# Allegro board solutionstida01606_powercard_6mar.brd
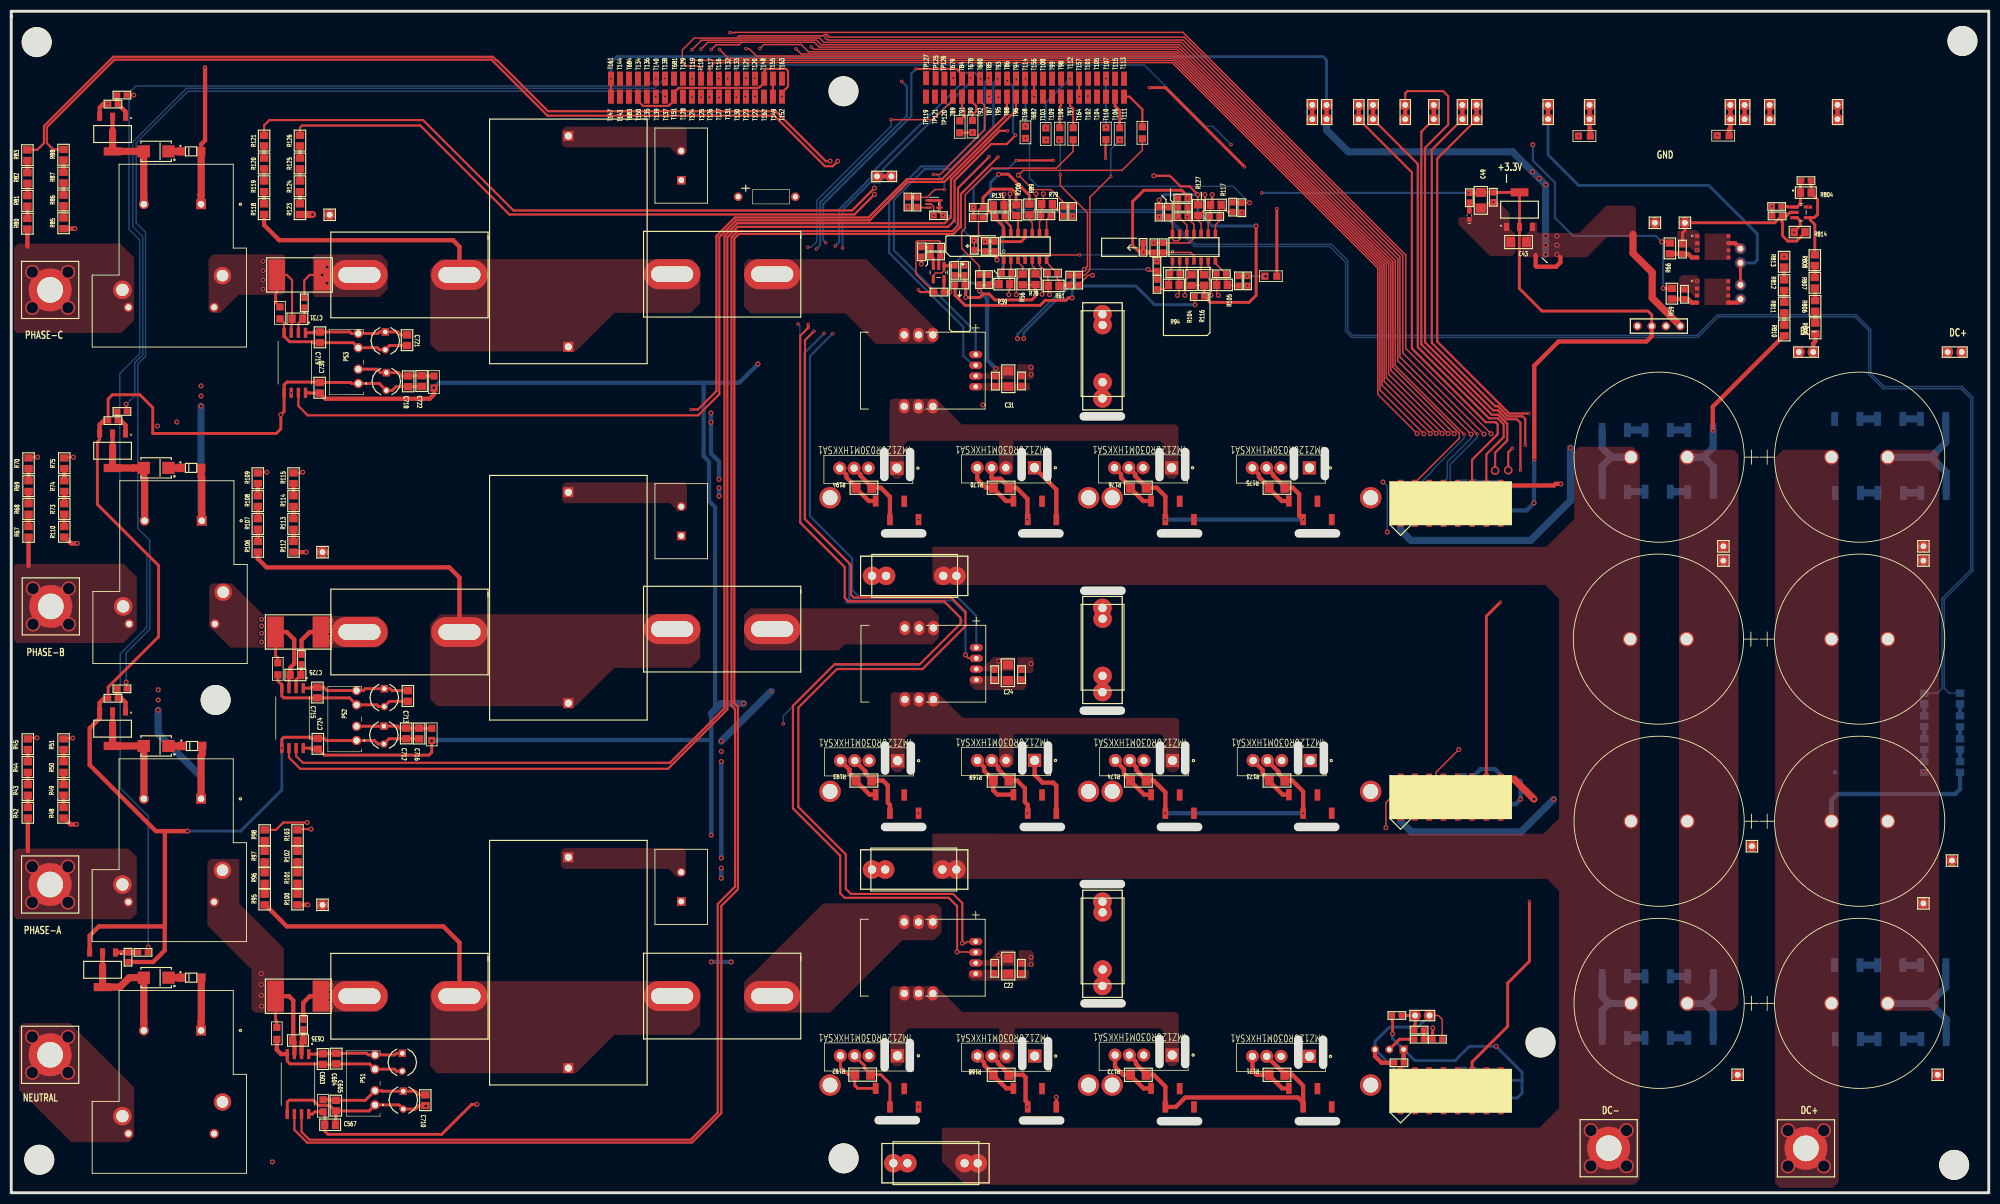
[diagram p0: board, top side]
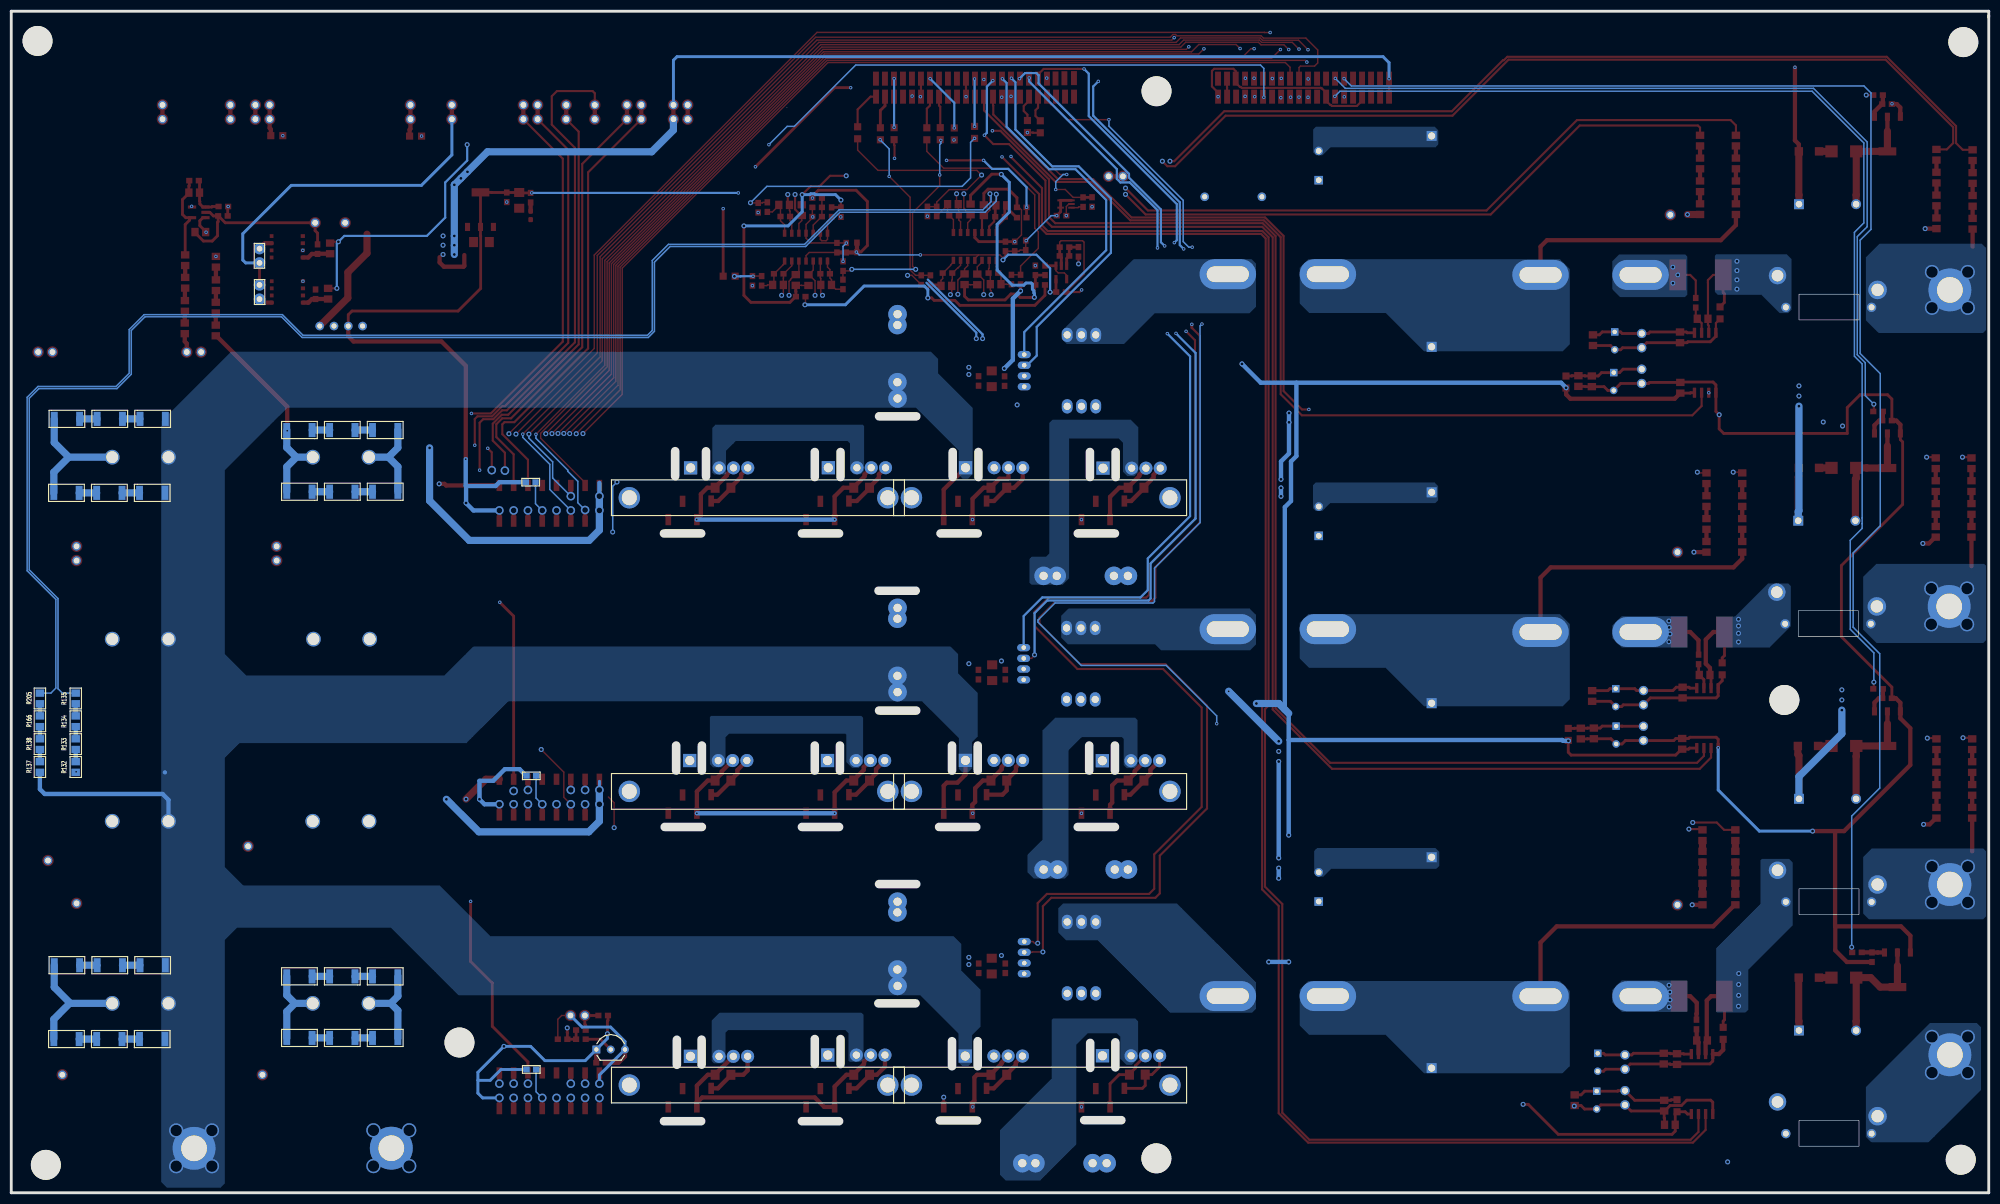
[diagram p1: board, bottom side, seen from below]

Outline 351.43 x 210.11 mm; copper layers: TOP, GND LAYER, PWR LAYER, BOTTOM. Coordinates in mm from the lower left corner of the outline.
Outline path: 0,209.07 0,210.11 351.43,210.11 351.43,0 0,0 0,209.35 ; 154.15,12.9 160.75,12.9 ; 155.17,131.72 155.17,127.28 ; 155.22,26.75 155.22,22.3 ; 155.29,117.25 161.9,117.25 ; 155.29,79.53 155.29,75.08 ; 155.29,65.05 161.9,65.05 ; 159.69,26.64 159.69,22.2 ; 159.74,131.72 159.74,127.28 ; 159.87,79.53 159.87,75.08 ; 179.55,131.72 179.55,127.28 ; 179.68,117.25 186.28,117.25 ; 179.68,79.53 179.68,75.08 ; 179.68,26.95 179.68,22.5 ; 179.8,12.85 186.41,12.85 ; 179.93,65.05 186.54,65.05 ; 184.12,131.72 184.12,127.28 ; 184.25,79.53 184.25,75.08 ; 184.25,26.95 184.25,22.5 ; 190.6,138.07 197.2,138.07 ; 190.6,85.75 197.2,85.75 ; 190.6,54.89 197.2,54.89 ; 190.7,107.06 197.3,107.06 ; 190.73,33.68 197.33,33.68 ; 204.06,131.72 204.06,127.28 ; 204.06,27.33 204.06,22.88 ; 204.16,79.53 204.16,75.08 ; 204.32,117.25 210.92,117.25 ; 204.32,65.05 210.92,65.05 ; 204.32,12.72 210.92,12.72 ; 208.63,131.72 208.63,127.28 ; 208.63,79.53 208.63,75.08 ; 208.63,27.33 208.63,22.88 ; 213.54,193.04 213.64,192.94 ; 227.96,131.85 227.96,127.41 ; 228.7,79.53 228.7,75.08 ; 228.7,65.05 235.3,65.05 ; 228.75,27.23 228.75,22.78 ; 228.83,117.25 235.43,117.25 ; 228.83,12.72 235.43,12.72 ; 233.14,27.2 233.14,22.76 ; 233.27,79.53 233.27,75.08 ; 233.45,131.88 233.45,127.43

## Design rules (mm)
constraint set DEFAULT: min track width 0.127

## Placement (name value [footprint] x y rotation side)
C1  0.15uF 630V TH  [BOXCAPACITOR15MM]  193.93 141.25 180 top
C2  0.15uF 630V TH  [BOXCAPACITOR15MM]  193.93 89.03 180 top
C3  0.15uF 630V TH  [BOXCAPACITOR15MM]  193.93 36.78 180 top
C4  Ele 120uF 600V TH  [CAP_B45_NCH]  323.49 130.81 0 top
C5  Ele 120uF 600V TH  [CAP_B45_NCH]  323.49 33.68 0 top
C6  Ele 120uF 600V TH  [CAP_B45_NCH]  297.86 33.68 180 top
C7  Ele 120uF 600V TH  [CAP_B45_NCH]  297.86 130.81 180 top
C8  10uF TH  [BOXCAP_37_5MM]  99.01 32.16 90 top
C9  10uF TH  [BOXCAP_37_5MM]  99.01 97.06 90 top
C10  10uF TH  [BOXCAP_37_5MM]  99.01 160.43 90 top
C11  0.15uF 630V TH  [BOXCAPACITOR15MM]  156.77 5.26 90 top
C12  0.15uF 630V TH  [BOXCAPACITOR15MM]  152.98 57.48 90 top
C13  0.15uF 630V TH  [BOXCAPACITOR15MM]  152.98 109.7 90 top
C22  10uF 1206 25V  [SNPD1206_MODIFIED]  177.19 40.31 90 top
C23  0.1uF 0603 25V  [RES0603]  174.78 39.92 90 top
C24  10uF 1206 25V  [SNPD1206_MODIFIED]  177.11 92.48 90 top
C25  0.1uF 0603 25V  [RES0603]  174.78 92.14 90 top
C31  10uF 1206 25V  [SNPD1206_MODIFIED]  177.19 144.75 90 top
C32  0.1uF 0603 25V  [RES0603]  174.9 144.34 90 top
C39  0.1uF 0603 25V  [RES0603]  253.45 27.3 180 top
C43  10u 1206 25V  [SNPD1206_MODIFIED]  267.87 169.06 180 top
C44  0.1u 0603 25V  [RES0603]  263.37 177.03 90 top
C47  0.1uF 0603 25V  [RES0603]  173.1 168.29 270 top
C49  10u 1206 25V  [SNPD1206_MODIFIED]  261.16 176.48 270 top
C51  0.1uF 0603 25V  [RES0603]  172.06 162.39 90 top
C52  0.1uF 0603 25V  [RES0603]  159.36 176.19 90 top
C53  0.1uF 0603 25V  [RES0603]  164.78 173.76 0 top
C54  0.1uF 0603 25V  [RES0603]  189.71 162.29 90 top
C55  0.1uF 0603 25V  [RES0603]  188.62 174.51 90 top
C56  1uF 0603 25V  [RES0603]  174.75 168.29 270 top
C57  0.1uF 0603 25V  [RES0603]  203.05 168.06 270 top
C58  1uF 0603 25V  [RES0603]  204.7 168.06 270 top
C59  0.1uF 0603 25V  [RES0603]  203.6 164.78 270 top
C60  0.1uF 0603 25V  [RES0603]  219.71 162.17 90 top
C63  0.1uF 0603 25V  [RES0603]  218.69 175.17 90 top
C69  0.1uF 0603 25V  [RES0603]  208.21 173.58 180 top
C70  0.1uF 0603 25V  [RES0603]  203.99 174.38 90 top
C71  0.1uF 0603 25V  [RES0603]  164.26 166.6 180 top
C72  0.1uF 0603 25V  [RES0603]  169.43 164.03 270 top
C73  Ele 120uF 600V TH  [CAP_B45_NCH]  323.49 98.45 0 top
C74  Ele 120uF 600V TH  [CAP_B45_NCH]  323.49 66.07 0 top
C75  Ele 120uF 600V TH  [CAP_B45_NCH]  297.86 66.07 180 top
C76  Ele 120uF 600V TH  [CAP_B45_NCH]  297.73 98.45 180 top
C83  100pF 0603 50V  [RES0603]  176.9 163.55 180 top
C84  100pF 0603 50V  [RES0603]  206.79 163.42 180 top
C85  100pF 0603 50V  [RES0603]  185.05 163.55 0 top
C86  100pF 0603 50V  [RES0603]  215.05 163.42 0 top
C87  100pF 0603 50V  [RES0603]  183.88 173.74 0 top
C88  100pF 0603 50V  [RES0603]  213.88 173.61 0 top
C90  0.1uF 0603 25V  [RES0603]  246.62 23.11 180 top
C120  0.068uF 630V TH  [BOXCAPACITOR10MM]  193.95 144.14 180 top
C121  0.068uF 630V TH  [BOXCAPACITOR10MM]  193.95 91.92 180 top
C122  0.068uF 630V TH  [BOXCAPACITOR10MM]  193.95 39.7 180 top
C127  0.068uF 630V TH  [BOXCAPACITOR10MM]  155.47 109.7 90 top
C128  0.068uF 630V TH  [BOXCAPACITOR10MM]  159.26 5.26 90 top
C129  0.068uF 630V TH  [BOXCAPACITOR10MM]  155.32 57.48 90 top
C130  2200PF 3KV 20%  [CAP400]  129.18 177.11 270 top
C133  100pF 0603 50V  [RES0603]  175.71 173.56 180 top
C134  0.1uF 0603 25V  [RES0603]  171.85 175.23 180 top
C135  0.1uF 0603 25V  [RES0603]  164.87 160.17 180 top
C567  0.1u 0805 50V  [SNPD0805_MODIFIED]  56.67 12.09 0 top
C603  0.1u 0805 50V  [SNPD0805_MODIFIED]  55.4 23.77 270 top
C604  1u 0805 50V  [SNPD0805_MODIFIED]  57.76 23.85 270 top
C605  0.1u 0805 50V  [SNPD0805_MODIFIED]  57.68 15.49 270 top
C629  47uF 25V  [CYLD200LS125031]  69.49 24.79 270 top
C632  47uF 25V  [CYLD200LS125031]  69.67 18.06 270 top
C635  100p 0805 25V  [SNPD0805_MODIFIED]  50.95 27.08 180 top
C710  1u 0805 50V  [SNPD0805_MODIFIED]  73.58 16.46 270 top
C711  47uF 25V  [CYLD200LS125031]  66.22 82.98 270 top
C712  1u 0805 50V  [SNPD0805_MODIFIED]  70.18 81.69 270 top
C713  0.1u 0805 50V  [SNPD0805_MODIFIED]  70.48 88.34 270 top
C714  47uF 25V  [CYLD200LS125031]  66.29 89.64 270 top
C715  1u 0805 50V  [SNPD0805_MODIFIED]  54.41 88.95 270 top
C716  0.1u 0805 50V  [SNPD0805_MODIFIED]  72.49 81.66 270 top
C717  47uF 25V  [CYLD200LS125031]  66.65 145.85 270 top
C718  1u 0805 50V  [SNPD0805_MODIFIED]  70.54 144.3 270 top
C719  0.1u 0805 50V  [SNPD0805_MODIFIED]  54.86 152.12 270 top
C720  47uF 25V  [CYLD200LS125031]  66.47 153.09 270 top
C721  1u 0805 50V  [SNPD0805_MODIFIED]  70.33 151.61 270 top
C722  0.1u 0805 50V  [SNPD0805_MODIFIED]  72.92 144.35 270 top
C724  0.1u 0805 50V  [SNPD0805_MODIFIED]  54.48 79.83 90 top
C725  100p 0805 25V  [SNPD0805_MODIFIED]  50.5 92.07 180 top
C730  0.1u 0805 50V  [SNPD0805_MODIFIED]  54.81 143.15 90 top
C731  100p 0805 25V  [SNPD0805_MODIFIED]  50.85 155.42 180 top
C732  100pF 0603 50V  [RES0603]  318.95 179.98 180 top
C733  0.1uF 0603 25V  [RES0603]  313.82 173.71 180 top
D1  BZV55C15-TP 15V  [DO214_REV3]  32.13 79.45 0 top
D2  BZV55C15-TP 15V  [DO214_REV3]  31.95 128.9 0 top
D3  B160-13-F  [DO214AB]  25.74 79.45 180 top
D4  BZV55C15-TP 15V  [DO214_REV3]  31.95 185.19 0 top
D5  BZV55C15-TP 15V  [DO214_REV3]  31.98 38.25 0 top
D6  B160-13-F  [DO214AB]  25.74 128.9 180 top
D7  B160-13-F  [DO214AB]  25.74 185.19 180 top
D8  B160-13-F  [DO214AB]  25.75 38.25 180 top
D19  LED GREEN 150060VS55040  [LED0603]  259.13 173.8 90 top
J1  CON2  [CONN_HIGHAMP_REV1]  318.95 10.44 0 top
J2  CON2  [CONN_HIGHAMP_REV1]  283.89 10.46 0 top
J3  CON2  [CONN_HIGHAMP_REV1]  6.91 57.35 0 top
J4  CON2  [CONN_HIGHAMP_REV1]  7.03 106.81 0 top
J7  NPTC041KFXC-RC  [NPTC041KFXC-RC_4PIN]  228.32 17.25 0 top
J9  NPTC041KFXC-RC  [NPTC041KFXC-RC_4PIN]  154.89 69.47 0 top
J12  NPTC041KFXC-RC  [NPTC041KFXC-RC_4PIN]  154.89 121.69 0 top
J14  NPTC041KFXC-RC  [NPTC041KFXC-RC_4PIN]  203.83 17.25 0 top
J15  NPTC041KFXC-RC  [NPTC041KFXC-RC_4PIN]  179.37 69.47 0 top
J16  NPTC041KFXC-RC  [NPTC041KFXC-RC_4PIN]  179.37 121.69 0 top
J17  NPTC041KFXC-RC  [NPTC041KFXC-RC_4PIN]  179.37 17.25 0 top
J18  NPTC041KFXC-RC  [NPTC041KFXC-RC_4PIN]  203.83 69.47 0 top
J19  NPTC041KFXC-RC  [NPTC041KFXC-RC_4PIN]  203.83 121.69 0 top
J20  NPTC041KFXC-RC  [NPTC041KFXC-RC_4PIN]  154.89 17.25 0 top
J21  NPTC041KFXC-RC  [NPTC041KFXC-RC_4PIN]  228.32 69.47 0 top
J22  NPTC041KFXC-RC  [NPTC041KFXC-RC_4PIN]  228.32 121.69 0 top
J23  -  [NPTC082KFMS-RC]  246.91 16.87 0 top
J24  -  [NPTC082KFMS-RC]  246.91 69.09 0 top
J25  -  [NPTC082KFMS-RC]  246.91 121.34 0 top
J26  61300211121  [SIP_2PIN_BERGSTRIP#2]  307.31 161.44 180 bottom
J27  CON2  [SIP_2PIN_BERGSTRIP]  252.04 31.52 270 top
J28  61300211121  [SIP_2PIN_BERGSTRIP#2]  307.31 165.35 0 bottom
J31  CON2  [CONN_HIGHAMP_REV1]  6.91 163.09 0 top
J32  CON2  [CONN_HIGHAMP_REV1]  6.91 27.08 0 top
J35  CON2  [SIP_2PIN_BERGSTRIP]  320.24 149.5 270 top
J36  CON2  [SIP_2PIN_BERGSTRIP]  346.66 149.5 270 top
J37  CON2  [SIP_2PIN_BERGSTRIP]  156.41 180.75 270 top
J38  PPTC041LFBN-RC  [JUMPER4MODIFIED]  296.62 154.13 180 top
J61  CON2  [SIP_2PIN_BERGSTRIP]  312.5 193.45 0 top
J62  CON2  [SIP_2PIN_BERGSTRIP]  252.81 193.45 0 top
J63  CON2  [SIP_2PIN_BERGSTRIP]  247.73 193.45 0 top
J64  CON2  [SIP_2PIN_BERGSTRIP]  257.89 193.45 0 top
J65  CON2  [SIP_2PIN_BERGSTRIP]  260.43 193.45 0 top
J66  CON2  [SIP_2PIN_BERGSTRIP]  305.51 193.45 0 top
J69  CON2  [SIP_2PIN_BERGSTRIP]  233.76 193.45 0 top
J73  CON2  [SIP_2PIN_BERGSTRIP]  239.47 193.45 0 top
J87  CON2  [SIP_2PIN_BERGSTRIP]  324.56 193.45 0 top
J88  CON2  [SIP_2PIN_BERGSTRIP]  231.22 193.45 0 top
J100  CON2  [SIP_2PIN_BERGSTRIP]  242.01 193.45 0 top
J182  Iso_Opamp_AMC1302 SOIC8_DWV  [SOIC127P1150X280-8N]  50.95 19.33 270 top
J612  CON2  [SIP_2PIN_BERGSTRIP]  308.05 193.45 0 top
J614  Iso_Opamp_AMC1302 SOIC8_DWV  [SOIC127P1150X280-8N]  49.99 84.4 270 top
J615  Iso_Opamp_AMC1302 SOIC8_DWV  [SOIC127P1150X280-8N]  50.39 147.6 270 top
J*  -  [unnamed#2]  241.59 71.37 180 bottom
J*#2  -  [unnamed#2]  241.59 19.15 180 bottom
J*#3  -  [unnamed#2]  241.59 123.6 180 bottom
J*#4  -  [unnamed#2]  191.45 123.6 180 bottom
J*#5  -  [unnamed#2]  191.45 71.37 180 bottom
J*#6  -  [unnamed#2]  191.45 19.15 180 bottom
K1  T9AS1D12-15  [RELAY_T9AS1D12-15_REV1]  33.73 70.05 180 top
K2  T9AS1D12-15  [RELAY_T9AS1D12-15_REV1]  33.86 119.51 180 top
K3  T9AS1D12-15  [RELAY_T9AS1D12-15_REV1]  33.73 175.79 180 top
K4  T9AS1D12-15  [RELAY_T9AS1D12-15_REV1]  33.73 28.85 180 top
L1  340uH  [CONN2_HIGHAMP]  122.53 34.98 180 top
L2  0.006E 15A  [CONN2_HIGHAMP]  66.95 34.95 180 top
L3  340uH  [CONN2_HIGHAMP]  122.53 100.23 180 top
L4  0.006E 15A  [CONN2_HIGHAMP]  66.95 99.72 180 top
L5  340uH  [CONN2_HIGHAMP]  122.53 163.35 180 top
L6  0.006E 15A  [CONN2_HIGHAMP]  66.95 163.22 180 top
L9  74279228260  [RES0603]  179.5 39.92 270 top
L10  74279228260  [RES0603]  179.55 92.14 270 top
L14  74279228260  [RES0603]  179.52 144.36 270 top
L21  74279228260  [RES0603]  171.14 168.49 270 top
L23  74279228260  [RES0603]  201.14 168.11 270 top
L25  10E 0805  [SMR0805]  55.4 14.4 90 top
L26  10E 0805  [SMR0805]  74.73 80.44 90 top
L27  10E 0805  [SMR0805]  75.13 143.1 90 top
L28  10E 0805  [SMR0805]  280.64 187.91 180 top
L29  10E 0805  [SMR0805]  305.31 187.99 180 top
L30  10E 0805  [SMR0805]  168.55 188.49 90 top
L31  10E 0805  [SMR0805]  170.84 188.54 90 top
L32  10E 0805  [SMR0805]  183.85 189.36 270 top
L33  10E 0805  [SMR0805]  194.54 189.41 270 top
L34  10E 0805  [SMR0805]  180.24 187.5 90 top
L35  10E 0805  [SMR0805]  186.33 187.27 90 top
L36  10E 0805  [SMR0805]  222.78 162.99 0 top
L37  10E 0805  [SMR0805]  188.72 187.25 90 top
L38  10E 0805  [SMR0805]  196.98 187.25 90 top
L39  10E 0805  [SMR0805]  201.02 187.43 90 top
L40  10E 0805  [SMR0805]  47.19 29.41 270 top
L41  10E 0805  [SMR0805]  47.37 94.23 270 top
L42  10E 0805  [SMR0805]  47.75 157.53 270 top
NOREF  -  [unnamed]  271.78 26.72 0 top
NOREF#2  -  [unnamed]  36.32 87.63 0 top
NOREF#3  -  [unnamed]  4.52 204.62 0 top
NOREF#4  -  [unnamed]  4.98 5.87 0 top
NOREF#5  -  [unnamed]  346.76 204.83 0 top
NOREF#6  -  [unnamed]  147.93 6.12 0 top
NOREF#7  -  [unnamed]  345.29 4.95 0 top
NOREF#8  -  [unnamed]  147.9 195.88 0 top
PS1  B0505S-1WR3  [B0505S1WR_REV1]  64.64 15.62 90 top
PS2  B0505S-1WR3  [B0505S1WR_REV1]  61.37 80.42 90 top
PS3  B0505S-1WR3  [B0505S1WR_REV1]  61.67 143.92 90 top
Q1  IMZ120R030M1HXKSA1  [TO254P1580X500X2522-4]  181.89 24.31 180 top
Q2  IMZ120R030M1HXKSA1  [TO254P1580X500X2522-4]  157.5 24.36 180 top
Q3  IMZ120R030M1HXKSA1  [TO254P1580X500X2522-4]  206.32 24.49 180 top
Q4  IMZ120R030M1HXKSA1  [TO254P1580X500X2522-4]  230.73 24.26 180 top
Q5  IMZ120R030M1HXKSA1  [TO254P1580X500X2522-4]  181.86 76.89 180 top
Q6  IMZ120R030M1HXKSA1  [TO254P1580X500X2522-4]  157.53 76.83 180 top
Q7  IMZ120R030M1HXKSA1  [TO254P1580X500X2522-4]  206.37 76.86 180 top
Q8  IMZ120R030M1HXKSA1  [TO254P1580X500X2522-4]  230.86 76.86 180 top
Q9  IMZ120R030M1HXKSA1  [TO254P1580X500X2522-4]  181.84 128.93 180 top
Q10  IMZ120R030M1HXKSA1  [TO254P1580X500X2522-4]  157.4 128.85 180 top
Q11  IMZ120R030M1HXKSA1  [TO254P1580X500X2522-4]  206.22 128.93 180 top
Q12  IMZ120R030M1HXKSA1  [TO254P1580X500X2522-4]  230.71 128.9 180 top
Q13  CSD18534Q5A  [TRANS_CSD18534Q5A]  302.36 160.2 0 top
Q14  CSD18534Q5A  [TRANS_CSD18534Q5A]  302.39 168.22 0 top
Q15  NDT3055L  [SOT223_4]  18.01 82.53 270 top
Q16  NDT3055L  [SOT223_4]  18.01 131.95 270 top
Q17  NDT3055L  [SOT223_4]  18.01 188.27 270 top
Q18  NDT3055L  [SOT223_4]  16.23 39.65 270 top
R1  510K 2010 5%  [RES2010N]  326.3 137.62 180 bottom
R2  510K 2010 5%  [RES2010N]  326.38 124.46 180 bottom
R3  510K 2010 5%  [RES2010N]  333.92 137.62 180 bottom
R4  510K 2010 5%  [RES2010N]  334 124.46 180 bottom
R5  0.001E 1052 1%  [RES_PSR400IT]  51 34.95 0 top
R6  510K 2010 5%  [RES2010N]  341.54 137.62 180 bottom
R7  510K 2010 5%  [RES2010N]  341.62 124.46 180 bottom
R8  10K 0603 1%  [RES0603]  259.02 74.14 0 bottom
R9  510K 2010 5%  [RES2010N]  300.22 124.66 0 bottom
R10  510K 2010 5%  [RES2010N]  300.22 135.64 0 bottom
R11  10K 0603 1%  [RES0603]  259.11 126.36 0 bottom
R12  510K 2010 5%  [RES2010N]  292.6 124.66 0 bottom
R13  510K 2010 5%  [RES2010N]  292.6 135.64 0 bottom
R14  510K 2010 5%  [RES2010N]  284.98 124.66 0 bottom
R15  510K 2010 5%  [RES2010N]  284.98 135.64 0 bottom
R16  0.68E 5% TH  [RES_SQM7_TYCO]  119.07 51.79 90 top
R17  0.68E 5% TH  [RES_SQM7_TYCO]  119.07 116.81 90 top
R18  0.68E 5% TH  [RES_SQM7_TYCO]  119.07 180.06 90 top
R32  10K 0603 1%  [RES0603]  259.02 21.92 0 bottom
R39  11K 0805 0.1%  [SNPD0805_MODIFIED]  176.49 161.57 0 top
R41  0.001E 1052 1%  [RES_PSR400IT]  51 99.72 0 top
R42  1M 0805 0.1%  [SNPD0805_MODIFIED]  2.94 67.57 270 top
R43  1M 0805 0.1%  [SNPD0805_MODIFIED]  2.94 71.64 270 top
R44  1M 0805 0.1%  [SNPD0805_MODIFIED]  2.94 75.7 270 top
R45  1K 0805 0.1%  [SNPD0805_MODIFIED]  2.94 79.77 270 top
R46  68.1E 0603 1%  [RES0603]  173.68 162.39 270 top
R47  0.001E 1052 1%  [RES_PSR400IT]  51.23 163.22 0 top
R48  1M 0805 0.1%  [SNPD0805_MODIFIED]  9.29 67.57 270 top
R49  1M 0805 0.1%  [SNPD0805_MODIFIED]  9.29 71.64 270 top
R50  1M 0805 0.1%  [SNPD0805_MODIFIED]  9.29 75.7 270 top
R51  1K 0805 0.1%  [SNPD0805_MODIFIED]  9.29 79.77 270 top
R52  10K 0603 1%  [RES0603]  250.2 27.3 180 top
R55  10K 0603 1%  [RES0603]  246.24 31.52 0 top
R56  11K 0805 0.1%  [SNPD0805_MODIFIED]  179.75 162.42 270 top
R58  10K 0603 1%  [RES0603]  250.2 28.93 180 top
R59  200E 0805 1%  [SNPD0805_MODIFIED]  295.12 159.88 270 top
R60  10K 0603 1%  [RES0603]  297.36 159.78 90 top
R61  11K 0805 1%  [SNPD0805_MODIFIED]  185.25 161.26 180 top
R66  200E 0805 1%  [SNPD0805_MODIFIED]  294.76 167.93 270 top
R67  1M 0805 0.1%  [SNPD0805_MODIFIED]  3.07 117.54 270 top
R68  1M 0805 0.1%  [SNPD0805_MODIFIED]  3.07 121.6 270 top
R69  1M 0805 0.1%  [SNPD0805_MODIFIED]  3.07 125.66 270 top
R70  1K 0805 0.1%  [SNPD0805_MODIFIED]  3.07 129.73 270 top
R71  68.1E 0603 1%  [RES0603]  188.08 162.29 270 top
R73  1M 0805 0.1%  [SNPD0805_MODIFIED]  9.42 121.6 270 top
R74  1M 0805 0.1%  [SNPD0805_MODIFIED]  9.42 125.66 270 top
R75  1K 0805 0.1%  [SNPD0805_MODIFIED]  9.42 129.73 270 top
R76  10K 0603 1%  [RES0603]  297 167.81 90 top
R78  11K 0805 0.1%  [SNPD0805_MODIFIED]  182.01 162.45 270 top
R79  11K 0805 0.1%  [SNPD0805_MODIFIED]  184.08 175.79 180 top
R80  1M 0805 0.1%  [SNPD0805_MODIFIED]  2.87 172.32 270 top
R81  1M 0805 0.1%  [SNPD0805_MODIFIED]  2.87 176.39 270 top
R82  1M 0805 0.1%  [SNPD0805_MODIFIED]  2.87 180.45 270 top
R83  1K 0805 0.1%  [SNPD0805_MODIFIED]  2.87 184.52 270 top
R84  68.1E 0603 1%  [RES0603]  186.97 174.51 270 top
R85  1M 0805 0.1%  [SNPD0805_MODIFIED]  9.29 172.4 270 top
R86  1M 0805 0.1%  [SNPD0805_MODIFIED]  9.29 176.46 270 top
R87  1M 0805 0.1%  [SNPD0805_MODIFIED]  9.29 180.53 270 top
R88  1K 0805 0.1%  [SNPD0805_MODIFIED]  9.29 184.59 270 top
R89  11K 0805 0.1%  [SNPD0805_MODIFIED]  180.95 174.86 90 top
R93  10K 0603 1%  [RES0603]  160.96 176.16 270 top
R94  11K 0805 0.1%  [SNPD0805_MODIFIED]  206.62 161.44 0 top
R95  1M 0805 0.1%  [SNPD0805_MODIFIED]  45.03 52.16 270 top
R96  1M 0805 0.1%  [SNPD0805_MODIFIED]  45.03 55.97 270 top
R97  1M 0805 0.1%  [SNPD0805_MODIFIED]  45.03 59.78 270 top
R98  1K 0805 0.1%  [SNPD0805_MODIFIED]  45.03 63.59 270 top
R99  68.1E 0603 1%  [RES0603]  203.63 161.53 270 top
R100  1M 0805 0.1%  [SNPD0805_MODIFIED]  50.87 52.16 270 top
R101  1M 0805 0.1%  [SNPD0805_MODIFIED]  50.87 55.97 270 top
R102  1M 0805 0.1%  [SNPD0805_MODIFIED]  50.87 59.78 270 top
R103  1K 0805 0.1%  [SNPD0805_MODIFIED]  50.87 63.59 270 top
R104  11K 0805 0.1%  [SNPD0805_MODIFIED]  209.75 162.3 270 top
R105  11K 0805 0.1%  [SNPD0805_MODIFIED]  215.17 161.44 180 top
R106  1M 0805 0.1%  [SNPD0805_MODIFIED]  43.81 114.87 270 top
R107  1M 0805 0.1%  [SNPD0805_MODIFIED]  43.81 118.93 270 top
R108  1M 0805 0.1%  [SNPD0805_MODIFIED]  43.81 123 270 top
R109  1K 0805 0.1%  [SNPD0805_MODIFIED]  43.81 127.06 270 top
R110  1M 0805 0.1%  [SNPD0805_MODIFIED]  9.42 117.54 270 top
R111  68.1E 0603 1%  [RES0603]  218.08 162.17 270 top
R112  1M 0805 0.1%  [SNPD0805_MODIFIED]  50.16 114.87 270 top
R113  1M 0805 0.1%  [SNPD0805_MODIFIED]  50.16 118.93 270 top
R114  1M 0805 0.1%  [SNPD0805_MODIFIED]  50.16 123 270 top
R115  1K 0805 0.1%  [SNPD0805_MODIFIED]  50.16 127.06 270 top
R116  11K 0805 0.1%  [SNPD0805_MODIFIED]  212.01 162.32 270 top
R117  11K 0805 0.1%  [SNPD0805_MODIFIED]  214.08 175.67 180 top
R118  1M 0805 0.1%  [SNPD0805_MODIFIED]  44.93 174.91 270 top
R119  1M 0805 0.1%  [SNPD0805_MODIFIED]  44.93 178.98 270 top
R120  1M 0805 0.1%  [SNPD0805_MODIFIED]  44.93 183.04 270 top
R121  1K 0805 0.1%  [SNPD0805_MODIFIED]  44.93 187.11 270 top
R122  68.1E 0603 1%  [RES0603]  217.07 175.27 270 top
R123  1M 0805 0.1%  [SNPD0805_MODIFIED]  51.31 174.91 270 top
R124  1M 0805 0.1%  [SNPD0805_MODIFIED]  51.31 178.98 270 top
R125  1M 0805 0.1%  [SNPD0805_MODIFIED]  51.31 183.04 270 top
R126  1K 0805 0.1%  [SNPD0805_MODIFIED]  51.31 187.11 270 top
R127  11K 0805 0.1%  [SNPD0805_MODIFIED]  210.94 174.74 90 top
R131  11K 0805 0.1%  [SNPD0805_MODIFIED]  175.49 175.59 0 top
R132  1M 0805 0.1%  [SNPD0805_MODIFIED]  339.98 75.71 270 bottom
R133  1M 0805 0.1%  [SNPD0805_MODIFIED]  339.98 79.78 270 bottom
R134  1M 0805 0.1%  [SNPD0805_MODIFIED]  339.98 83.84 270 bottom
R135  1K 0805 0.1%  [SNPD0805_MODIFIED]  339.98 87.91 270 bottom
R136  68.1E 0603 1%  [RES0603]  171.85 173.41 0 top
R137  1M 0805 0.1%  [SNPD0805_MODIFIED]  346.34 75.71 270 bottom
R138  1M 0805 0.1%  [SNPD0805_MODIFIED]  346.34 79.78 270 bottom
R139  10K 0603 0.1%  [RES0603]  208.21 176.89 180 top
R140  10E 0603 5%  [RES0603]  205.64 174.38 270 top
R141  10K 0603 0.1%  [RES0603]  208.21 175.23 0 top
R142  10K 0603 0.1%  [RES0603]  161.77 167.32 90 top
R143  10E 0603 5%  [RES0603]  167.71 164.03 90 top
R144  10K 0603 0.1%  [RES0603]  164.26 168.16 0 top
R166  1M 0805 0.1%  [SNPD0805_MODIFIED]  346.34 83.84 270 bottom
R168  10K 1206 5%  [SNPD1206_MODIFIED]  175.92 20.98 180 top
R169  10K 1206 5%  [SNPD1206_MODIFIED]  175.92 73.3 180 top
R170  10K 1206 5%  [SNPD1206_MODIFIED]  175.92 125.37 180 top
R171  10K 1206 5%  [SNPD1206_MODIFIED]  224.94 20.98 0 top
R172  10K 1206 5%  [SNPD1206_MODIFIED]  200.31 20.98 0 top
R173  10K 1206 5%  [SNPD1206_MODIFIED]  224.94 73.3 0 top
R174  10K 1206 5%  [SNPD1206_MODIFIED]  200.31 73.3 0 top
R175  10K 1206 5%  [SNPD1206_MODIFIED]  224.94 125.37 0 top
R176  10K 1206 5%  [SNPD1206_MODIFIED]  200.31 125.37 0 top
R178  10E 0603 5%  [RES0603]  211.14 159.36 180 top
R179  10E 0603 5%  [RES0603]  168.58 161.44 180 top
R180  510K 2010 5%  [RES2010N]  326.3 40.46 180 bottom
R181  510K 2010 5%  [RES2010N]  326.38 27.33 180 bottom
R182  510K 2010 5%  [RES2010N]  333.92 40.46 180 bottom
R183  510K 2010 5%  [RES2010N]  334 27.33 180 bottom
R184  510K 2010 5%  [RES2010N]  341.54 40.46 180 bottom
R185  510K 2010 5%  [RES2010N]  341.62 27.33 180 bottom
R186  510K 2010 5%  [RES2010N]  300.22 38.48 0 bottom
R187  510K 2010 5%  [RES2010N]  300.22 27.53 0 bottom
R188  510K 2010 5%  [RES2010N]  292.6 38.48 0 bottom
R189  510K 2010 5%  [RES2010N]  292.6 27.53 0 bottom
R190  510K 2010 5%  [RES2010N]  284.98 38.48 0 bottom
R191  510K 2010 5%  [RES2010N]  284.98 27.53 0 bottom
R192  0E 1206 1%  [SNPD1206_MODIFIED]  151.31 21.01 180 top
R193  0E 1206 1%  [SNPD1206_MODIFIED]  151.54 73.3 180 top
R194  0E 1206 1%  [SNPD1206_MODIFIED]  151.54 125.37 180 top
R197  100E 0603 5%  [RES0603]  19.67 89.61 0 top
R198  100E 0603 5%  [RES0603]  19.67 138.94 0 top
R199  100E 0603 5%  [RES0603]  19.67 195.2 0 top
R200  100E 0603 5%  [RES0603]  23.42 42.75 0 top
R201  2K 0603 5%  [RES0603]  18.07 87.93 0 top
R202  2K 0603 5%  [RES0603]  18.07 193.6 0 top
R203  2K 0603 5%  [RES0603]  20.75 41.88 90 top
R204  2K 0603 5%  [RES0603]  18.07 137.31 0 top
R205  1K 0805 0.1%  [SNPD0805_MODIFIED]  346.34 87.91 270 bottom
R206  11K 0805 0.1%  [SNPD0805_MODIFIED]  178.59 174.73 90 top
R208  820E 0603 1%  [RES0603]  259.13 176.95 90 top
R793  105E 0603 1%  [RES0603]  51.94 29.92 90 top
R795  105E 0603 1%  [RES0603]  51.56 94.84 90 top
R803  105E 0603 1%  [RES0603]  52.07 158.27 90 top
R804  11K 0805 0.1%  [SNPD0805_MODIFIED]  318.92 177.85 0 top
R805  1M 0805 0.1%  [SNPD0805_MODIFIED]  320.6 153.72 270 top
R806  1M 0805 0.1%  [SNPD0805_MODIFIED]  320.57 157.71 270 top
R807  1M 0805 0.1%  [SNPD0805_MODIFIED]  320.52 161.82 270 top
R808  1K 0805 0.1%  [SNPD0805_MODIFIED]  320.52 165.84 270 top
R809  68.1E 0603 1%  [RES0603]  313.74 175.39 0 top
R810  1M 0805 0.1%  [SNPD0805_MODIFIED]  315.09 153.34 270 top
R811  1M 0805 0.1%  [SNPD0805_MODIFIED]  315.09 157.4 270 top
R812  1M 0805 0.1%  [SNPD0805_MODIFIED]  315.06 161.39 270 top
R813  1K 0805 0.1%  [SNPD0805_MODIFIED]  315.06 165.56 270 top
R814  11K 0805 0.1%  [SNPD0805_MODIFIED]  317.83 170.84 0 top
RF1  47  [FUSE600]  36.06 51.71 270 bottom
RF2  47  [FUSE600]  36.19 101.17 270 bottom
RF3  47  [FUSE600]  36.06 157.45 270 bottom
RF4  47  [FUSE600]  36.06 10.52 270 bottom
T84  T  [PINCONTROLCARD]  168.97 198.12 90 top
T85  T  [PINCONTROLCARD]  173.77 198.12 90 top
T86  T  [PINCONTROLCARD]  176.97 198.12 90 top
T87  T  [PINCONTROLCARD]  173.76 194.92 90 top
T88  T  [PINCONTROLCARD]  176.96 194.92 90 top
T89  T  [PINCONTROLCARD]  167.36 194.92 90 top
T90  T  [PINCONTROLCARD]  170.56 194.92 90 top
T91  T  [PINCONTROLCARD]  168.96 194.92 90 top
T92  T  [PINCONTROLCARD]  172.16 194.92 90 top
T93  T  [PINCONTROLCARD]  175.37 198.12 90 top
T94  T  [PINCONTROLCARD]  178.57 198.12 90 top
T95  T  [PINCONTROLCARD]  175.36 194.92 90 top
T96  T  [PINCONTROLCARD]  178.56 194.92 90 top
T97  T  [PINCONTROLCARD]  188.16 194.92 90 top
T98  T  [PINCONTROLCARD]  186.57 198.12 90 top
T99  T  [PINCONTROLCARD]  184.97 198.12 90 top
T100  T  [PINCONTROLCARD]  186.56 194.92 90 top
T101  T  [PINCONTROLCARD]  191.37 198.12 90 top
T102  T  [PINCONTROLCARD]  191.35 194.92 90 top
T103  T  [PINCONTROLCARD]  183.36 194.92 90 top
T104  T  [PINCONTROLCARD]  192.95 194.92 90 top
T105  T  [PINCONTROLCARD]  192.96 198.12 90 top
T106  T  [PINCONTROLCARD]  196.15 194.92 90 top
T107  T  [PINCONTROLCARD]  194.56 198.12 90 top
T108  T  [PINCONTROLCARD]  183.37 198.12 90 top
T109  T  [PINCONTROLCARD]  184.96 194.92 90 top
T110  T  [PINCONTROLCARD]  194.55 194.92 90 top
T111  T  [PINCONTROLCARD]  197.75 194.92 90 top
T112  T  [PINCONTROLCARD]  188.17 198.12 90 top
T113  T  [PINCONTROLCARD]  197.76 198.12 90 top
T114  T  [PINCONTROLCARD]  180.17 198.12 90 top
T115  T  [PINCONTROLCARD]  196.16 198.12 90 top
T116  T  [PINCONTROLCARD]  125.77 198.12 90 top
T117  T  [PINCONTROLCARD]  124.17 198.12 90 top
T118  T  [PINCONTROLCARD]  122.57 198.12 90 top
T119  T  [PINCONTROLCARD]  120.97 198.12 90 top
T120  T  [PINCONTROLCARD]  132.17 198.12 90 top
T121  T  [PINCONTROLCARD]  130.57 198.12 90 top
T122  T  [PINCONTROLCARD]  132.16 194.92 90 top
T123  T  [PINCONTROLCARD]  130.56 194.92 90 top
T124  T  [PINCONTROLCARD]  120.96 194.92 90 top
T125  T  [PINCONTROLCARD]  122.56 194.92 90 top
T126  T  [PINCONTROLCARD]  124.16 194.92 90 top
T127  T  [PINCONTROLCARD]  125.76 194.92 90 top
T128  T  [PINCONTROLCARD]  119.36 194.92 90 top
T129  T  [PINCONTROLCARD]  119.37 198.12 90 top
T130  T  [PINCONTROLCARD]  128.96 194.92 90 top
T131  T  [PINCONTROLCARD]  127.36 194.92 90 top
T132  T  [PINCONTROLCARD]  127.37 198.12 90 top
T133  T  [PINCONTROLCARD]  128.97 198.12 90 top
T134  T  [PINCONTROLCARD]  111.38 198.12 90 top
T135  T  [PINCONTROLCARD]  112.96 194.92 90 top
T136  T  [PINCONTROLCARD]  112.97 198.12 90 top
T137  T  [PINCONTROLCARD]  116.16 194.92 90 top
T138  T  [PINCONTROLCARD]  116.17 198.12 90 top
T139  T  [PINCONTROLCARD]  114.56 194.92 90 top
T140  T  [PINCONTROLCARD]  114.57 198.12 90 top
T143  T  [PINCONTROLCARD]  108.17 194.92 90 top
T144  T  [PINCONTROLCARD]  108.18 198.12 90 top
T147  T  [PINCONTROLCARD]  106.58 194.92 90 top
T148  T  [PINCONTROLCARD]  133.82 198.12 90 top
T149  T  [PINCONTROLCARD]  135.36 194.92 90 top
T150  T  [PINCONTROLCARD]  111.36 194.92 90 top
T151  T  [PINCONTROLCARD]  117.76 194.92 90 top
T152  T  [PINCONTROLCARD]  136.96 194.92 90 top
T155  T  [PINCONTROLCARD]  135.37 198.12 90 top
T156  T  [PINCONTROLCARD]  181.77 198.12 90 top
T157  T  [PINCONTROLCARD]  189.77 198.12 90 top
T158  T  [PINCONTROLCARD]  180.16 194.92 90 top
T161  T  [PINCONTROLCARD]  106.58 198.12 90 top
T162  T  [PINCONTROLCARD]  133.76 194.92 90 top
T163  T  [PINCONTROLCARD]  136.97 198.12 90 top
T164  T  [PINCONTROLCARD]  189.75 194.92 90 top
T678  T  [PINCONTROLCARD]  170.57 198.12 90 top
T679  T  [PINCONTROLCARD]  167.37 198.12 90 top
T680  T  [PINCONTROLCARD]  172.17 198.12 90 top
T681  T  [PINCONTROLCARD]  117.77 198.12 90 top
T682  T  [PINCONTROLCARD]  181.76 194.92 90 top
T683  T  [PINCONTROLCARD]  109.76 194.92 90 top
T684  T  [PINCONTROLCARD]  109.78 198.12 90 top
TP2  TEST POINT  [TESTPOINT]  292.1 172.49 0 top
TP3  TEST POINT  [TESTPOINT]  297.43 172.49 0 top
TP4  TEST POINT  [TESTPOINT]  306.8 20.98 0 top
TP5  TEST POINT  [TESTPOINT]  342.36 20.98 0 top
TP6  TEST POINT  [TESTPOINT]  309.34 61.62 0 top
TP7  TEST POINT  [TESTPOINT]  339.82 51.46 0 top
TP8  TEST POINT  [TESTPOINT]  344.9 59.08 0 top
TP9  TEST POINT  [TESTPOINT]  304.26 114.96 0 top
TP10  TEST POINT  [TESTPOINT]  304.26 112.42 0 top
TP11  TEST POINT  [TESTPOINT]  339.82 114.96 0 top
TP12  TEST POINT  [TESTPOINT]  339.82 112.42 0 top
TP13  TEST POINT  [TESTPOINT]  55.32 51.21 0 top
TP14  TEST POINT  [TESTPOINT]  55.32 113.92 0 top
TP15  TEST POINT  [TESTPOINT]  56.59 173.91 0 top
TP119  TP  [PINCONTROLCARD]  162.56 194.92 90 top
TP120  TP  [PINCONTROLCARD]  165.76 194.92 90 top
TP121  TP  [PINCONTROLCARD]  164.16 194.92 90 top
TP125  TP  [PINCONTROLCARD]  164.27 198.2 90 top
TP126  TP  [PINCONTROLCARD]  165.85 198.14 90 top
TP127  TP  [PINCONTROLCARD]  162.57 198.22 90 top
TP145  CON2  [SIP_2PIN_BERGSTRIP]  273.13 193.45 0 top
TP146  CON2  [SIP_2PIN_BERGSTRIP]  280.49 193.45 0 top
U3  CASR 15-NP  [CASR_LEM]  163.78 35.46 270 top
U4  CASR 15-NP  [CASR_LEM]  163.88 87.73 270 top
U6  CASR 15-NP  [CASR_LEM]  163.78 139.85 270 top
U13  LMT87LPM  [TO92100]  247.44 25.48 180 bottom
U15  TLV1117LV33DCYR  [SOT223_4]  268.04 174.83 90 top
U17  LMT87QDCKRQ1  [DCK5]  163.98 175.83 0 top
U18  OPA4350UA  [SOIC14]  180.19 168.29 90 top
U19  OPA4350UA  [SOIC14]  210.18 168.16 90 top
U20  OPA340NA/250  [DBV5]  164.82 163.65 270 top
U21  OPA340NA/250  [DBV5]  318.11 174.35 0 top

## Library data of the parts
C1-C3 C8-C13 C22-C25 C31 C32 C39 C47 C51-C60 C63 C69-C72 C83-C88 C90 C120-C122 C127-C130 C133-C135 C732 C733 = CAPACITOR NON-POL: room: pic_pic
C4-C7 C73-C76 = CAPACITOR POL_0: User Part Number: PN; Tolerance: TOL; room: ControlSMPS
C43 C44 C49 = CAP NP: room: control_smps
C567 C603-C605 C635 C710 = CAP NP: room: I_sh_A
C629 C632 = CAP POL: room: I_sh_A
C711 C714 = CAP POL: room: I_sh2
C712 C713 C715 C716 C724 C725 = CAP NP: room: I_sh2
C717 C720 = CAP POL: room: I_sh3
C718 C719 C721 C722 C730 C731 = CAP NP: room: I_sh3
D1 D2 D4 D5 = DIODE ZENER: room: supplyReg_pic
D3 D6-D8 = DIODE: room: lcd_led_pic
D19 = LED: room: lcd_led_pic
J1-J4 J31 J32 = CON2_0
J7 J9 J12 J14-J22 = HEADER 4_0
J23-J25 = HEADER 8X2_0
J26-J28 J35-J37 = CON2: room: InputPowe_smps
J38 = HEADER 4_1
J61-J66 J69 J73 J87 J88 J100 J612 TP145 TP146 = CON2: room: smps
J182 = CON MC4_0: room: I_sh_A
J614 = CON MC4_0: room: I_sh2
J615 = CON MC4_0: room: I_sh3
K1-K4 = CON2_3
L1-L6 = INDUCTOR: room: supply_gprs
L9 L10 L14 L21 L23 = VARISTOR_0
L25 L40 = INDUCTOR: room: I_sh_A
L26 L41 = INDUCTOR: room: I_sh2
L27 L42 = INDUCTOR: room: I_sh3
L28-L39 = INDUCTOR: room: I_source
PS1 = B0505S-1WR3_0: room: I_sh_A
PS2 = B0505S-1WR3_0: room: I_sh2
PS3 = B0505S-1WR3_0: room: I_sh3
Q1-Q12 = IMZ120R030M1HXKSA1
Q13 Q14 = CSD18534Q5A
Q15-Q18 = IRF1010E/TO_1
R1-R4 R6 R7 R9 R10 R12-R15 R17 R18 R41 R47 R180-R191 = RESISTOR: User Part Number: PN; Tolerance: TOL; room: pic_pic
R5 = RESISTOR: User Part Number: PN; room: pic_pic
R8 R11 R16 R32 R39 R42-R46 R48-R52 R55 R56 R58 R61 R67-R71 R73-R75 R78-R89 R93-R127 R131-R144 R166 R168-R176 R178 R179 R192-R194 R197-R206 R804-R814 = RESISTOR: room: pic_pic
R59 R60 R66 R76 R208 = RESISTOR: room: control_smps
R793 = RESISTOR: room: I_sh_A
R795 = RESISTOR: room: I_sh2
R803 = RESISTOR: room: I_sh3
RF1-RF4 = FUSE: Tolerance: ***; User Part Number: ***
T84-T140 T143 T144 T147-T152 T155-T158 T161-T164 T678-T684 = TEST POINT_0: room: microcontroller
TP2-TP15 = TEST POINT
TP119-TP121 TP125-TP127 = TEST POINT: room: microcontroller
U3 = socket8_6: User Part Number: PN; Tolerance: TOL; room: 3
U4 = socket8_7: User Part Number: PN; Tolerance: TOL; room: 3
U6 = socket8_8: User Part Number: PN; Tolerance: TOL; room: 3
U13 = socket8_2: room: 3
U15 = DM3AT-SF-PEJM5_2
U17 = socket8_9: User Part Number: PN; Tolerance: TOL; room: 3
U18 U19 = OPA4340_8
U20 U21 = OPA340_0: User Part Number: PN; Tolerance: TOL

## Footprints (pads in the part's own frame, mm; a bottom-side part is the same pattern mirrored in y, then rotated)
B0505S1WR_REV1
  round 1.65 hole 1.1: 1(0,0) 2(2.54,0) 3(6.35,0) 4(8.89,0)
BOXCAP_37_5MM
  rect 1.778x1.778 hole 1.27: 1(-10,0) 2(27.5,0)
BOXCAPACITOR10MM
  round 3.302 hole 1.473: 1(0,0) 2(0,-10.16)
BOXCAPACITOR15MM
  round 3.302 hole 1.473: 1(0,0) 2(0,-14.986)
CAP400
  round 1.524 hole 0.914: 1(0,0) 2(0,10.16)
CAP_B45_NCH
  round 2.616 hole 2.108: 1(0,0) 2(10,0)
CASR_LEM
  oval 2.54x1.905 hole 1.295: 1(0,0) 2(0,-2.54) 3(0,-5.08) 8(-12.7,-5.08) 9(-12.7,-2.54) 10(-12.7,0)
  oval 1.295x2.311 hole 0.813: 11(-9.207,7.63) 12(-7.303,7.63) 13(-5.397,7.63) 14(-3.493,7.63)
CONN2_HIGHAMP
  oval 10.033x5.334 hole 7.493x2.794: 1(-12.7,0) 2(5.08,0)
CONN_HIGHAMP_REV1
  round 7.62 hole 4.572: 1(0,-2.54)
CYLD200LS125031
  rect 1.321x1.321 hole 0.787: 1(0,0)
  round 1.321 hole 0.787: 2(3.175,0)
DBV5
  rect 1.473x0.559 smd: 1(-1.194,0.95) 2(-1.194,0) 3(-1.194,-0.95) 4(1.194,-0.95) 5(1.194,0.95)
DCK5
  rect 1.168x0.356 smd: 1(-0.965,0.65) 2(-0.965,0) 3(-0.965,-0.65) 4(0.965,-0.65) 5(0.965,0.65)
DO214_REV3
  rect 1.5x1.5 smd: 1(-1.8,0) 2(1.8,0)
DO214AB
  rect 2.2x2.15 smd: 1(-2.2,0) 2(2.2,0)
FUSE600
  round 1.651 hole 1.067: 1(0,0) 2(0,15.24)
JUMPER4MODIFIED
  round 1.524 hole 0.914: 1(0,0) 2(2.54,0) 3(5.08,0) 4(7.62,0)
LED0603
  custom 0.91x0.83 smd: 1(-0.75,0) 2(0.75,0)
NPTC041KFXC-RC_4PIN
  rect 1x2 smd: 1(-1.27,1.321) 2(1.27,-1.981) 3(3.81,1.27) 4(6.35,-1.981)
NPTC082KFMS-RC
  rect 1x2 smd: 1(0,4.445) 2(0,-1.905) 3(2.54,4.445) 4(2.54,-1.905) 5(5.08,4.445) 6(5.08,-1.905) 7(7.62,4.445) 8(7.62,-1.905) 9(10.16,4.445) 10(10.16,-1.905) 11(12.7,4.445) 12(12.7,-1.905) 13(15.24,4.445) 14(15.24,-1.905) 15(17.78,4.445) 16(17.78,-1.905)
PINCONTROLCARD
  rect 2.5x1.05 smd: 1(0,0)
RELAY_T9AS1D12-15_REV1
  round 3.09 hole 2.06: 1(-3.81,12.7)
  round 3.29 hole 2.19: 2(13.97,15.24)
  rect 1.76x1.76 hole 1.17: 3(0,0)
  round 1.76 hole 1.17: 4(10.16,0)
RES0603
  rect 1.1x1 smd: 1(-0.85,0) 2(0.85,0)
RES2010N
  rect 1.206x2.5 smd: 1(-2.253,0) 2(2.253,0)
RES_PSR400IT
  rect 2.946x5.512 smd: 1(-4.039,0) 2(4.039,0)
RES_SQM7_TYCO
  rect 1.524x1.524 hole 1.016: 1(0,0)
  round 1.524 hole 1.016: 2(5.207,0)
SIP_2PIN_BERGSTRIP
  round 2.032 hole 1.016: 1(0,0) 2(0,-2.54)
SIP_2PIN_BERGSTRIP#2
  round 1.524 hole 1.016: 1(0,0) 2(0,-2.54)
SMR0805
  rect 1.27x1.27 smd: 1(0,0) 2(2.134,0)
SNPD0805_MODIFIED
  rect 1.3x1.5 smd: 1(-0.95,0) 2(0.95,0)
SNPD1206_MODIFIED
  rect 1.6x1.8 smd: 1(-1.4,0) 2(1.4,0)
SOIC14
  rect 1.27x0.635 smd: 1(-2.477,3.81) 2(-2.477,2.54) 3(-2.477,1.27) 4(-2.477,0) 5(-2.477,-1.27) 6(-2.477,-2.54) 7(-2.477,-3.81) 8(2.477,-3.81) 9(2.477,-2.54) 10(2.477,-1.27) 11(2.477,0) 12(2.477,1.27) 13(2.477,2.54) 14(2.477,3.81)
SOIC127P1150X280-8N
  custom 1.8x0.6 smd: 1(-5.33,1.905) 2(-5.33,0.635) 3(-5.33,-0.635) 4(-5.33,-1.905) 5(5.33,-1.905) 6(5.33,-0.635) 7(5.33,0.635) 8(5.33,1.905)
SOT223_4
  rect 1.45x0.9 smd: 1(-3.075,2.3) 2(-3.075,0) 3(-3.075,-2.3)
  rect 1.45x3.15 smd: 4(3.075,0)
TESTPOINT
  round 2.032 hole 1.016: 1(0,0)
TO254P1580X500X2522-4
  rect 2.35x2.35 hole 1.63: 1(0,0)
  round 2.32 hole 1.3: 2(5.08,0) 3(7.62,0) 4(10.16,0)
TO92100
  rect 1.397x1.397 hole 0.787: 1(0,0)
  round 1.397 hole 0.787: 2(2.54,0) 3(5.08,0)
TRANS_CSD18534Q5A
  rect 0.75x0.68 smd: 1(-2.77,1.905) 2(-2.77,0.635) 3(-2.77,-0.635) 4(-2.77,-1.905)
  rect 0.66x0.68 smd: 5(2.78,-1.905) 6(2.78,-0.635) 7(2.78,0.635) 8(2.78,1.905)
unnamed
  round 5.588 hole 5.334 unplated: (0,0)
unnamed#2
  round 3.81 hole 2.667: 1(0,0) 2(45.939,0)

## Nets
1.65V_U18: C72.2 R56.2 R78.2 R89.2 R143.1 R179.1
1.65V_U19: C70.2 R104.2 R116.2 R127.2 R140.1 R178.1
3.3V: C44.2 C47.2 C49.1 C53.2 C56.2 C57.2 C58.2 C90.1 C135.1 J23.16 J24.16 J25.16 J38.3 L21.1 L21.2 L23.1 L23.2 R8.2 R11.2 R32.2 R55.1 R139.1 R142.1 R208.2 U13.1(VDD) U15.2 U15.4(OUT2) U17.1 U17.4 U17.5(VDD3) U18.4 U19.4 U20.5 U21.5
3.3VADC: T158.1
3.3VCC: T149.1 T155.1
5V: C43.1 C567.1 C724.1 C730.1 J38.1 J69.1 J69.2 J182.8 J614.8 J615.8 L9.1 L10.1 L14.1 L25.1 L26.1 L27.1 T147.1 T161.1 U15.3
5V_1: C603.1 C604.1 C629.1 J182.1 PS1.4
5V_2: C713.1 C714.1 C715.1 J614.1 PS2.4
5V_3: C719.1 C720.1 C721.1 J615.1 PS3.4
5VCC1: T163.1
15V: TP2.1
22VPWR1: J23.11 J65.1 J65.2
22VPWR2: J24.11 J62.1 J62.2
22VPWR3: J25.11 J73.1 J73.2
+12V: D1.2 D2.2 D4.2 D5.2 J23.15 J24.15 J25.15 J26.1 J28.1 K1.3 K2.3 K3.3 K4.3 TP145.1 TP145.2
+15V: J612.1 J612.2
GND12V: L28.1 TP146.1 TP146.2
GND15V: J66.1 J66.2 L29.1
GND22VPWR1: J23.13 J64.1 J64.2
GND22VPWR2: J24.13 J63.1 J63.2
GND22VPWR3: J25.13 J100.1 J100.2
GND_ADC: T156.1 T157.1 T164.1 T682.1
GND_AMC1: C603.2 C604.2 C629.2 J182.4 L40.2 PS1.3
GND_AMC2: C713.2 C714.2 C715.2 J614.4 L41.2 PS2.3
GND_AMC3: C719.2 C720.2 C721.2 J615.4 L42.2 PS3.3
PGND: C1.2 C2.2 C3.2 C4.2 C5.2 C6.1 C7.1 C11.1 C12.1 C13.1 C73.2 C74.2 C75.1 C76.1 C120.2 C121.2 C122.2 C127.1 C128.1 C129.1 C130.1 K4.1 Q4.1 Q8.1 Q12.1 R6.1 R7.1 R9.2 R10.2 R16.1 R17.1 R18.1 R100.2 R112.2 R123.2 R132.2 R184.1 R185.1 R186.2 R187.2 R810.2 RF4.1 TP4.1 TP5.1 TP6.1 TP7.1 TP8.1 TP9.1 TP10.1 TP11.1 TP12.1 TP13.1 TP14.1 TP15.1
V1.65: R178.2 R179.2
VINV_A: C635.2 J182.3 K1.1 L40.1 R5.1 RF1.1
VINV_B: C725.2 J614.3 K2.1 L41.1 R41.1 RF2.1
VINV_C: C731.2 J615.3 K3.1 L42.1 R47.1 RF3.1
VINV_SEN_A: C59.2 L35.1 R99.1
VINV_SEN_B: C60.2 L36.1 R111.1
VINV_SEN_C: C63.2 L34.1 R122.1
0: C22.2 C23.2 C24.2 C25.2 C31.2 C32.2 C39.1 C43.2 C44.1 C47.1 C49.2 C51.1 C52.1 C53.1 C54.1 C55.1 C56.1 C57.1 C58.1 C59.1 C60.1 C63.1 C69.1 C70.1 C71.1 C72.1 C90.2 C130.2 C134.1 C135.2 C567.2 C605.2 C632.2 C710.2 C711.2 C712.2 C716.2 C717.2 C718.2 C722.2 C724.2 C730.2 C733.1 D19.1(CATHODE) J23.1 J23.2 J24.1 J24.2 J25.1 J25.2 J27.1 J37.1 J37.2 J38.4 J88.1 J88.2 J182.5 J614.5 J615.5 L28.2 L29.2 L30.1 L31.1 PS1.1 PS2.1 PS3.1 Q13.1 Q13.2 Q13.3 Q14.1 Q14.2 Q14.3 Q15.3(S) Q16.3(S) Q17.3(S) Q18.3(S) R60.2 R76.2 R141.2 R144.2 R201.1 R202.1 R203.1 R204.1 R206.2 R814.2 T148.1 T150.1 T151.1 T152.1 TP3.1 U3.13 U4.13 U6.13 U13.3 U15.1 U17.2 U18.11 U19.11 U20.2 U21.2
ADC_A0: L37.2 T97.1
ADC_A1: T98.1
ADC_A2: T99.1
ADC_A3: L35.2 T100.1
ADC_A4: T101.1
ADC_A5: L36.2 T102.1
ADC_A6: T103.1
ADC_A8: T104.1
ADC_A9: T105.1
ADC_B0: L38.2 T106.1
ADC_B1: L33.1 T107.1
ADC_B2: T108.1
ADC_B3: T109.1
ADC_B4: T110.1
ADC_C0: L39.2 T111.1
ADC_C1: L32.1 T112.1
ADC_C2: T113.1
ADC_C4: L34.2 T114.1
ADC_C14: T115.1
D4: R197.2 T137.1
D5: R198.2 T138.1
D6: R199.2 T139.1
D7: R200.2 T140.1
DC+: C1.1 C2.1 C3.1 C4.1 C5.1 C73.1 C74.1 C120.1 C121.1 C122.1 J1.1 J15.4 J16.4 J17.4 J36.1 J36.2 Q1.1 Q5.1 Q9.1 R1.2 R2.2 R137.2 R180.2 R181.2
DC-: C6.2 C7.2 C11.2 C12.2 C13.2 C75.2 C76.2 C127.2 C128.2 C129.2 J2.1 J35.1 J35.2 Q2.2 Q6.2 Q10.2 R14.1 R15.1 R190.1 R191.1 R805.2
DIS1PWM: J23.8 J24.8 J25.8 T132.1
DIS2PWM: T133.1
ECAP3: T134.1
EN: T136.1
EPWM1A: J23.5 T116.1
EPWM1B: J23.4 T117.1
EPWM2A: J23.6 T118.1
EPWM2B: J23.3 T119.1
EPWM3A: J24.5 T120.1
EPWM3B: J24.4 T121.1
EPWM4A: J24.6 T122.1
EPWM4B: J24.3 T123.1
EPWM5A: J25.5 T124.1
EPWM5B: J25.4 T125.1
EPWM6A: J25.6 T126.1
EPWM6B: J25.3 T127.1
EPWM7A: T128.1
EPWM7B: T129.1
EPWM8A: R59.1 R66.1 T130.1
EPWM8B: T131.1
EXTSWT: T162.1
FLT_A: J23.10 R32.1
FLT_B: J24.10 R8.1
FLT_C: J25.10 R11.1
I1P: C635.1 J182.2 R793.1
I2P: C725.1 J614.2 R795.1
I3P: C731.1 J615.2 R803.1
IGRID_A: L2.2 R5.2 R793.2
IGRID_B: L4.2 R41.2 R795.2
IGRID_C: L6.2 R47.2 R803.2
IIND_A: Q1.2 Q2.1 Q3.1 U3.1 U3.2 U3.3
IIND_A_RTN: L1.1 U3.8 U3.9 U3.10
IIND_B: Q5.2 Q6.1 Q7.1 U4.1 U4.2 U4.3
IIND_B_RTN: L3.1 U4.8 U4.9 U4.10
IIND_C: Q9.2 Q10.1 Q11.1 U6.1 U6.2 U6.3
IIND_C_RTN: L5.1 U6.8 U6.9 U6.10
LCD_LIGHT: T681.1
NEU: J32.1 K4.2 R48.2 R85.2 R110.2 RF4.2
NTR: J87.1 J87.2
OPAMP_A1+: J182.7 T87.1
OPAMP_A1-: J182.6 T95.1
OPAMP_A2+: T679.1 U3.12
OPAMP_A2-: T84.1 U3.11(VREF)
OPAMP_A4+: T680.1 U4.12
OPAMP_A4-: T678.1 U4.11(VREF)
OPAMP_A6+: T85.1 U6.12
OPAMP_A6-: T93.1 U6.11(VREF)
OPAMP_B2+: J615.7 T96.1
OPAMP_B2-: J615.6 T88.1
OPAMP_B4+: J614.7 T94.1
OPAMP_B4-: J614.6 T86.1
OPAMP_C2+: C39.2 R52.1 R58.1 T89.1
OPAMP_C2-: L30.2 T91.1
OPAMP_C3+: C52.2 R93.1 T92.1
OPAMP_C3-: L31.2 T90.1
PA_N: C83.1 R39.2 R45.1 U18.2
PA_P: R51.1 R56.1 U18.3
PB_N: C85.1 R61.2 R70.1 U18.6
PB_P: R75.1 R78.1 U18.5
PC_N: C87.1 R79.2 R83.1 U18.9
PC_P: R88.1 R89.1 U18.10
PD_N: C133.1 R131.2 R135.1 U18.13
PD_P: R205.1 R206.1 U18.12
PGA1_GND: TP125.1
PGA1_IN: TP121.1
PGA3_GND: TP126.1
PGA3_IN: TP120.1
PGA5_GND: TP127.1
PGA5_IN: TP119.1
PH_A: J3.1 K1.2 R42.2 RF1.2
PH_B: J4.1 K2.2 R67.2 RF2.2
PH_C: J31.1 K3.2 R80.2 RF3.2
Q1A: J17.1 Q1.4 R168.2
Q1A_N: J17.2 J20.4 Q1.3(SENSE) R168.1
Q1B: J15.1 Q5.4 R169.2
Q1B_N: J9.4 J15.2 Q5.3(SENSE) R169.1
Q1C: J16.1 Q9.4 R170.2
Q1C_N: J12.4 J16.2 Q9.3(SENSE) R170.1
Q2A: J20.1 Q2.4 R192.2
Q2A_N: J20.2 Q2.3(SENSE) R192.1
Q2B: J9.1 Q6.4 R193.2
Q2B_N: J9.2 Q6.3(SENSE) R193.1
Q2C: J12.1 Q10.4 R194.2
Q2C_N: J12.2 Q10.3(SENSE) R194.1
Q3A: J14.1 Q3.4 R172.1
Q3B: J18.1 Q7.4 R174.1
Q3C: J19.1 Q11.4 R176.1
Q4A: J7.1 Q4.4 R171.1
Q4B: J21.1 Q8.4 R173.1
Q4C: J22.1 Q12.4 R175.1
QA_N: J7.2 J14.2 Q3.3(SENSE) Q4.3(SENSE) R171.2 R172.2
QB_N: J18.2 J21.2 Q7.3(SENSE) Q8.3(SENSE) R173.2 R174.2
QC_N: J19.2 J22.2 Q11.3(SENSE) Q12.3(SENSE) R175.2 R176.2
RDY: J23.12 J24.12 J25.12
RS: T135.1
RST: J23.14 J24.14 J25.14
SCIB_RX: T684.1
SCIB_TX: T683.1
SCL_A: T144.1
SDA_A: T143.1
SMPS-P: J61.1 J61.2
VA_N: C84.1 R94.2 R98.1 U19.2
VA_P: R103.1 R104.1 U19.3
VB_N: C86.1 R105.2 R109.1 U19.6
VB_P: R115.1 R116.1 U19.5
VC_N: C88.1 R117.2 R121.1 U19.9
VC_P: R126.1 R127.1 U19.10
VDC_SEN: J38.2
VG_SEN_A: C51.2 L37.1 R46.1
VG_SEN_B: C54.2 L38.1 R71.1
VG_SEN_C: C55.2 L39.1 R84.1
VMID_SEN_B: C733.2 L32.2 R809.1
VMID_SEN_T: C134.2 L33.2 R136.1
VSEN_A: C8.1 L1.2 L2.1 R95.2
VSEN_B: C9.1 L3.2 L4.1 R106.2
VSEN_C: C10.1 L5.2 L6.1 R118.2
N13930831: Q3.2 Q4.2
N13931486: Q7.2 Q8.2
N13931754: Q11.2 Q12.2
N13935824: C8.2 R16.2
N13935828: C9.2 R17.2
N13935832: C10.2 R18.2
N13938639: D3.2 K1.4 Q15.2 Q15.4
N13938962: Q15.1 R197.1 R201.2
N13942026: D6.2 K2.4 Q16.2 Q16.4
N13942078: Q16.1 R198.1 R204.2
N13942443: D7.2 K3.4 Q17.2 Q17.4
N13942499: Q17.1 R199.1 R202.2
N13942871: D8.2 K4.4 Q18.2 Q18.4
N13942927: Q18.1 R200.1 R203.2
N13952073: C22.1 C23.1 L9.2 U3.14
N13956128: C24.1 C25.1 L10.2 U4.14
N13957373: C31.1 C32.1 L14.2 U6.14
N13962517: R95.1 R96.2
N13962521: R96.1 R97.2
N13962525: R97.1 R98.2
N13962529: R100.1 R101.2
N13962533: R101.1 R102.2
N13962537: R102.1 R103.2
N13962920: C84.2 R94.1 R99.2 U19.1
N13966303: R106.1 R107.2
N13966307: R107.1 R108.2
N13966311: R108.1 R109.2
N13966315: R112.1 R113.2
N13966319: R113.1 R114.2
N13966323: R114.1 R115.2
N13966367: C86.2 R105.1 R111.2 U19.7
N13967295: R118.1 R119.2
N13967299: R119.1 R120.2
N13967303: R120.1 R121.2
N13967307: R123.1 R124.2
N13967311: R124.1 R125.2
N13967315: R125.1 R126.2
N13967359: C88.2 R117.1 R122.2 U19.8
N13968711: R140.2 U19.13 U19.14(OUT)
N13968894: C69.2 R139.2 R141.1 U19.12
N13971097: R80.1 R81.2
N13971101: R81.1 R82.2
N13971105: R82.1 R83.2
N13971109: R85.1 R86.2
N13971113: R86.1 R87.2
N13971117: R87.1 R88.2
N13971145: C87.2 R79.1 R84.2 U18.8
N13971857: R42.1 R43.2
N13971861: R43.1 R44.2
N13971865: R44.1 R45.2
N13971869: R48.1 R49.2
N13971873: R49.1 R50.2
N13971877: R50.1 R51.2
N13971921: C83.2 R39.1 R46.2 U18.1
N13972313: R67.1 R68.2
N13972317: R68.1 R69.2
N13972321: R69.1 R70.2
N13972325: R73.2 R110.1
N13972329: R73.1 R74.2
N13972333: R74.1 R75.2
N13972361: C85.2 R61.1 R71.2 U18.7
N14375392: D4.1(CATHODE) D7.1(K)
N14612483: R143.2 U20.1(OUT) U20.4
N14612495: C71.2 R142.2 R144.1 U20.3
N14613330: C133.2 R131.1 R136.2 U18.14(OUT)
N14613438: R132.1 R133.2
N14613442: R133.1 R134.2
N14613446: R134.1 R135.2
N14613580: R137.1 R138.2
N14613584: R138.1 R166.2
N14613588: R166.1 R205.2
N14739396: C605.1 C632.1 C710.1 L25.2 PS1.2(VIN)
N14739692: C711.1 C712.1 C716.1 L26.2 PS2.2(VIN)
N14739988: C717.1 C718.1 C722.1 L27.2 PS3.2(VIN)
N14761149: D19.2 R208.1
N14762846: R52.2 U13.2
N14762934: J27.2 R55.2 R58.2
N14763052: R93.2 U17.3
N14767744: J26.2 Q13.5 Q13.6 Q13.7 Q13.8
N14767820: Q13.4 R59.2 R60.1
N14767910: J28.2 Q14.5 Q14.6 Q14.7 Q14.8
N14767982: Q14.4 R66.2 R76.1
N14782539: C732.1 R804.2 R808.1 U21.4
N14782555: C732.2 R804.1 R809.2 U21.1(OUT)
N14782697: R805.1 R806.2
N14782701: R806.1 R807.2
N14782705: R807.1 R808.2
N14782835: R810.1 R811.2
N14782839: R811.1 R812.2
N14782843: R812.1 R813.2
N14782847: R813.1 R814.1 U21.3
N146736940: R189.1 R191.2
N146736941: R187.1 R189.2
N146738420: R10.1 R13.2
N146738621: D2.1(CATHODE) D6.1(K)
N146740741: R12.1 R14.2
N146741380: R2.1 R4.2
N146742660: R186.1 R188.2
N146743860: R3.1 R6.2
N146743861: R1.1 R3.2
N146746781: R13.1 R15.2
N146749821: D1.1(CATHODE) D3.1(K)
N146750020: R4.1 R7.2
N146751820: R180.1 R182.2
N146752301: D5.1(CATHODE) D8.1(K)
N146752501: R188.1 R190.2
N146753061: R9.1 R12.2
N146754380: R182.1 R184.2
N146758060: R181.1 R183.2
N146758980: R183.1 R185.2

Pads without a net: J7 3 4; J9 3; J12 3; J14 3 4; J15 3; J16 3; J17 3; J18 3 4; J19 3 4; J20 3; J21 3 4; J22 3 4; J23 7 9; J24 7 9; J25 7 9; J* 1 2; J*#2 1 2; J*#3 1 2; J*#4 1 2; J*#5 1 2; J*#6 1 2

## Via types
v1: diameter 0.889, hole 0.508, TOP to BOTTOM, 158 vias
v2: diameter 0.61, hole 0.33, TOP to BOTTOM, 139 vias
v3: diameter 1.524, hole 1.016, TOP to BOTTOM, 39 vias
v4: diameter 2.54, hole 2.032, TOP to BOTTOM, 24 vias

## Routing (per net, layer and track width the routed paths; a pad name or vN(x,y) marks a point on that pad's centre or on a via; arc(x,y) is an arc through that point)
1.65V_U18: length 60.7
  TOP w0.254: R78.2 181.01,161.5 180.98,161.47 R56.2
  TOP w0.508: R143.1 C72.2 R179.1 169.61,161.26 v1(169.61,159.23) 170.3,159.23 170.32,159.21 172.13,159.21 172.76,159.83 173.77,159.83 174.83,158.77 181.35,158.77 182.01,159.44 R78.2 ; v1(175.49,181.1) 175.68,181.1 175.71,181.13 177.18,181.13 180.95,177.37 R89.2
  BOTTOM w0.508: v1(175.49,181.1) 174.06,179.68 174.06,174.37 176.22,172.21 176.22,164.08 173.53,161.39 171.49,161.39 171.11,161.77 170.17,161.77 169.96,161.57 169.96,160.67 169.7,160.4 169.7,160 169.61,159.92 v1(169.61,159.23)
1.65V_U19: length 62.9
  TOP w0.254: R127.2 210.94,176.59 210.87,176.67 v1(210.87,177.5) ; 211.99,160.24 211.99,160.44 212.01,160.47 ; R116.2 211.01,161.37 210.98,161.35 R104.2
  TOP w0.381: v1(203.05,180.85) 205.92,180.85 207.8,178.97 209.4,178.97 v1(210.87,177.5) ; C70.2 v1(203.99,176.53)
  TOP w0.508: C70.2 R140.1 ; R116.2 212.01,160.27 211.99,160.24 R178.1 212.04,159.36 213.05,158.34 219.99,158.34 221.23,159.59 v1(221.23,171.93)
  BOTTOM w0.508: v1(221.23,171.93) 213.38,171.93 210.87,174.45 v1(210.87,177.5) 209.51,177.5 209.36,177.65 208.73,177.65 208.57,177.5 204.95,177.5 v1(203.99,176.53)
3.3V: length 509.9
  TOP w0.254: U19.4 210.18,166.65 209.62,167.21 C58.2 ; 179.54,166.78 175.74,166.78 175.18,166.22 175.18,166.21 ; 179.54,166.78 180.19,166.13 U18.4 ; 179.54,166.78 v2(189.87,166.78) ; L21.1 L21.2 172.14,167.64 172.34,167.44 C47.2 C56.2
  TOP w0.381: C135.1 166.59,160.17 166.6,160.16 v1(166.81,160.16) ; v1(161.76,165.18) 161.77,165.19 R142.1 ; v1(175.18,165.89) 175.18,166.21 174.75,166.65 C56.2
  TOP w0.508: R139.1 209.06,177.22 208,178.28 201.29,178.28 199.29,176.28 199.29,168.45 200.43,167.31 201.14,167.31 ; U20.5 165.77,160.22 C135.1 ; R208.2 261.08,177.8 C49.1 C44.2 266.06,177.88 266.09,177.9 U15.4 U15.2 268.04,170.18 268.01,170.15 268.01,160.81 272.03,156.79 290.88,156.79 291.54,156.14 J38.3 ; v2(165.63,173.76) 164.95,174.45 U17.4 U17.5 U17.1 ; v1(245.49,28.27) 245.49,30.54 245.39,30.64 R55.1
  TOP w0.762: v3(264.69,69.09) J24.16 ; v2(270.66,130.45) 270.66,147.06 274.98,151.38 290.6,151.38 291.54,152.32 J38.3 ; C90.1 247.47,24.24 247.44,24.27 U13.1 ; C58.2 C57.2 201.19,167.21 L23.2 L23.1 ; J25.16 v3(264.69,121.34) ; v3(264.69,16.87) J23.16
  PWR LAYER w0.381: v1(166.81,160.16) 162.24,164.74 162.21,164.74 162.21,164.74 162.2,164.74 v1(161.76,165.18)
  PWR LAYER w0.508: J38.3 291.54,152.63 292.05,152.12 306.35,152.12 309.17,154.94 309.17,168 316.59,175.41 v2(319.38,175.41) ; v2(222.22,177.8) 222.22,175.34 219.61,172.72 213.21,172.72 v2(209.04,176.89)
  PWR LAYER w1.27: v1(263.88,26.03) 265.46,27.61 265.46,36.88 274.55,45.98 274.55,63.65 v1(268.22,69.98) 271.5,73.26 271.5,75.31 273.84,77.65 273.84,119.43 v1(270.61,122.66)
  BOTTOM w0.254: v2(189.87,166.78) 200.74,166.78 v2(201.24,167.28) ; v2(171.07,169.32) 166.62,173.76 v2(165.63,173.76)
  BOTTOM w0.381: v2(222.22,177.8) v2(258.93,177.8) ; v1(166.81,160.16) 166.81,164.38 169.24,166.81 174.26,166.81 v1(175.18,165.89)
  BOTTOM w0.508: 268.5,19.99 266.32,19.99 264.39,21.92 R32.2 ; 268.5,19.99 268.5,21.41 v1(263.88,26.03) 259.13,26.03 256.59,23.49 249.43,23.49 U13.1 245.49,27.43 v1(245.49,28.27) ; 268.5,19.99 268.5,17.7 267.66,16.87 v3(264.69,16.87)
  BOTTOM w0.762: v2(270.66,130.45) 270.66,125.73 270.61,125.68 ; v3(264.69,69.09) 267.33,69.09 v1(268.22,69.98) 268.22,73.25 265.78,73.25 263.7,75.34 261.11,75.34 259.92,74.14 R8.2 ; 270.61,125.68 v1(270.61,122.66) 269.29,121.34 v3(264.69,121.34) ; 270.61,125.68 265.35,125.68 264.67,126.36 R11.2
3.3VCC: length 3.2
  TOP w0.381: T155.1 135.37,196.5 135.36,196.49 T149.1
5V: length 806.9
  TOP w0.381: T147.1 v2(106.58,198.12)
  TOP w0.508: J182.8 53.54,14 53.94,14.4 L25.1 55.72,14.08 C567.1 55.72,10.96 56.29,10.39 76.5,10.39 81.84,15.72 v1(82.75,15.72) ; J614.8 53.16,79.07 53.35,78.88 C724.1 54.58,78.88 55.64,77.83 74.22,77.83 74.73,78.33 L26.1 ; C730.1 53.04,142.2 52.98,142.27 J615.8 52.3,142.87
  TOP w0.762: 275.31,166.37 275.31,165.44 274.55,164.68 271.05,164.68 270.91,164.82 270.91,166.75 ; v1(75.11,143.15) 75.11,141.96 74.35,141.2 55.82,141.2 C730.1 ; J69.1 J69.2
  TOP w1.27: 288.21,170.46 288.21,167.08 291.62,163.68 291.62,159.13 J38.1
  PWR LAYER w0.762: v1(132.71,147.4) 164.51,147.4 170.81,153.7 182.32,153.7 186.66,149.35 ; v1(124.41,63.6) v1(124.41,41.05) 124.41,20.17 119.96,15.72 v1(82.75,15.72) ; v1(127.96,41.05) 163.75,41.05 168.48,36.32 180.24,36.32 181.25,37.34 v1(181.25,40.59)
  PWR LAYER w1.27: v1(181.25,94.08) 181.25,91.11 179.3,89.15 170.18,89.15 166.42,92.91 151.73,92.91 145.82,87.01 v1(130.15,87.01)
  BOTTOM w0.381: 188.54,162.38 178.81,152.65 v1(178.81,151.89) ; 188.8,161.82 179.93,152.96 v1(179.93,151.89)
  BOTTOM w0.508: v2(106.58,198.12) 106.58,200.96 107.65,202.03 233.12,202.03 233.76,201.4 J69.1
  BOTTOM w0.762: 123.04,144.04 123.04,131 124,130.05 124,123.01 125.09,121.92 125.09,85.93 ; 123.04,144.04 76,144.04 v1(75.11,143.15) ; 123.04,144.04 129.36,144.04 v1(132.71,147.4) ; v1(74.7,80.37) 75.65,80.37 75.81,80.52 124.41,80.52 ; 124.41,85.24 124.41,80.52 ; 124.41,80.52 v1(124.41,63.6) ; v1(124.41,41.05) v1(127.96,41.05)
  BOTTOM w1.27: v1(272.69,166.85) v1(272.69,168.5) v1(272.69,170.15) v1(272.69,179.25) 272.67,179.25 v1(271.52,180.39) v1(270.36,181.56) 266.8,185.12 237.62,185.12 233.76,188.98 J69.2 ; v1(130.15,87.01) 126.17,87.01 124.41,85.24
  vias: v1(181.25,146.79) v1(181.25,145.52) v1(181.25,41.86) v1(274.7,170.15) v1(274.7,168.5) v1(274.7,166.85)
5V_1: length 16.9
  TOP w0.508: C629.1 68.45,24.79 68.17,24.51 PS1.4 63.44,24.51 63.15,24.8 C604.1 56.63,24.8 56.55,24.72 C603.1 54.27,24.72 54.2,24.66 J182.1
5V_2: length 19.2
  TOP w0.508: C713.1 67.68,89.29 67.34,89.64 C714.1 62.9,89.64 62.57,89.31 PS2.4 56.13,89.31 55.54,89.9 C715.1 53.28,89.9 53.11,89.73 J614.1
5V_3: length 18.5
  TOP w0.508: J615.1 53.59,152.93 53.73,153.07 C719.1 60.2,153.07 60.47,152.81 PS3.4 65.15,152.81 65.43,153.09 C720.1 68.68,153.09 69.2,152.56 C721.1
22VPWR1: length 193.7
  TOP w0.381: v2(269.65,138.58) 266.19,138.58 253.42,151.36 253.42,183.9 J65.2
  TOP w0.508: J23.11 259.61,23.26 265.94,29.59 265.94,37.29 269.8,41.15 v2(269.8,51.82)
  TOP w0.762: J65.1 J65.2
  PWR LAYER w0.381: 265.28,76.63 265.28,115.85 267.92,118.49 267.92,125.73 272.1,129.91 272.1,136.13 v2(269.65,138.58)
  PWR LAYER w0.508: v2(269.8,51.82) 266.4,55.22 266.4,69.19 265.28,70.31 265.28,76.63
22VPWR2: length 188.5
  TOP w0.381: J62.2 250.6,188.7 250.6,150.88 263.12,138.35 264.27,138.35 265.86,136.76 265.86,133.76 263.7,131.6 v3(263.7,128.42)
  TOP w0.762: J62.1 J62.2 ; J24.11 v3(259.61,71.63)
  PWR LAYER w0.254: v3(259.61,19.41) 258.39,20.62 258.39,70.41 v3(259.61,71.63) 259.61,117.25 258.39,118.47 258.39,123.11 v3(263.7,128.42)
